# Altium PCB lagd_pcb.PcbDoc (part 6 of 7)
Units mm, origin at the board's own origin, x right, y up, seen from the top; angles counter-clockwise.
Board outline 172 x 145 mm, 6 copper layers (Top Layer, Layer 1, Layer 2, Layer 3, Layer 4, Bottom Layer), stack 0.816 mm thick; 588 components, 338 nets, 2165 pads, 565 vias.
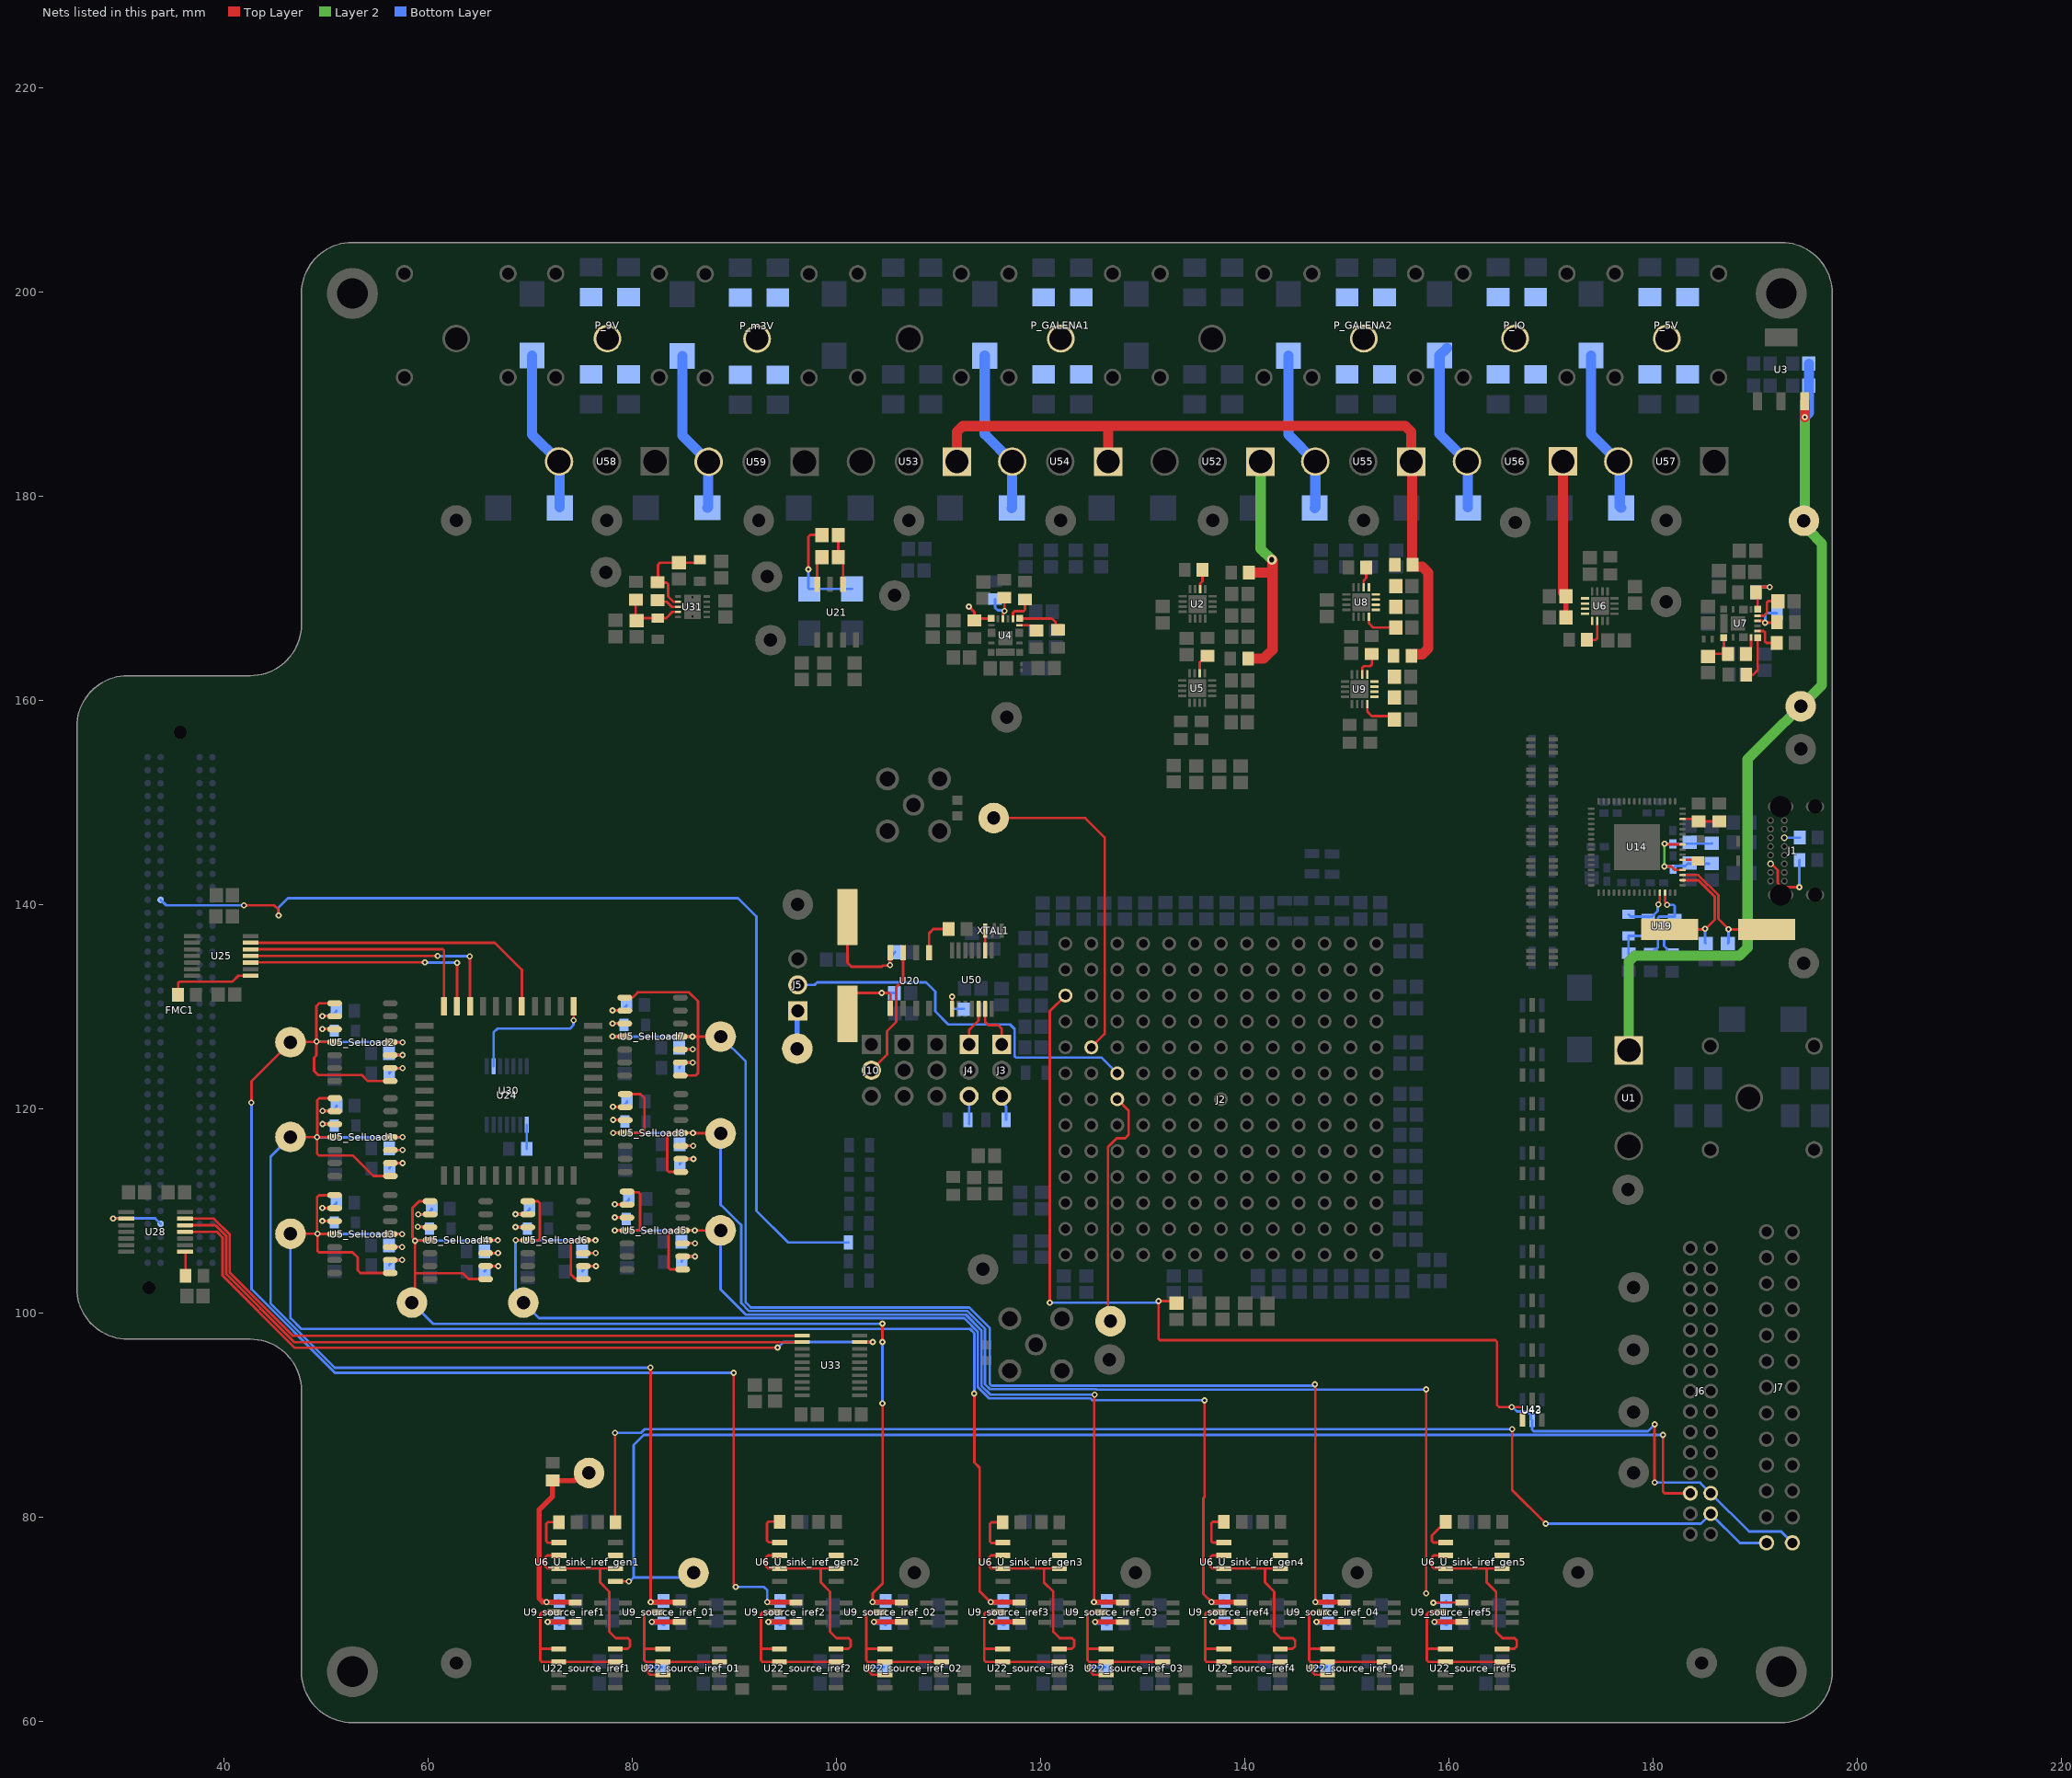
[diagram p9: the nets of this part, all layers, seen from the top]

## Via types
v1: diameter 0.6, hole 0.3, Top Layer to Bottom Layer, tented both sides, 505 vias
v2: diameter 0.3, hole 0.3, Top Layer to Bottom Layer, 20 vias
v3: diameter 0.55, hole 0.3, Top Layer to Bottom Layer, tented both sides, 18 vias
v4: diameter 0.55, hole 0.2, Top Layer to Bottom Layer, 16 vias
v5: diameter 0.6/0.6/0.6/0.6/0.6/0.6 (per signal layer), hole 0.3, Top Layer to Bottom Layer, tented both sides, 2 vias
v6: diameter 0.55/0.55/0.55/0.55/0.55/0.55 (per signal layer), hole 0.3, Top Layer to Bottom Layer, tented both sides, 2 vias
v7: diameter 1, hole 0.5, Top Layer to Bottom Layer, tented both sides, 2 vias

## Nets (pads, with @x,y where several pads share a name; then routed paths per layer and width w, separated by ;. In a path a pad name is that pad's centre, name@x,y a point inside that pad or via, vN(x,y) a via of type N, cw(c..) or ccw(c..) an arc to the next point about the centre after c; other vN are vias at no path point) (continued)
NetC49_2: C49.2 R26.2 U7.7 | length 3.8
  Top Layer w0.25: C49.2@185.396,164.311 185.646,164.561 R26.2@187.346,164.561 186.933,164.973 U7.7@186.933,166.123
NetC51_1: C51.1 U8.8 | length 3.4
  Top Layer w0.25: U8.8@152.151,168.175 152.153,168.173 152.153,167.554 152.574,167.133 C51.1@154.787,167.133
NetC52_2: C52.2 U7.15 | length 3.2
  Top Layer w0.25: U7.15@190.221,168.286 190.871,168.286 191.146,168.561 191.146,169.564 191.292,169.711 C52.2@192.221,169.711
NetC53_2: C53.2 C54.2 R30.1 U8.9 U8.10 U8.11 U8.12 U8.13
NetC55_1: C55.1 U9.8 | length 3.7
  Top Layer w0.25: U9.8@152.008,159.64 152.008,158.899 152.437,158.47 154.307,158.47 C55.1@154.66,158.116
NetC56_2: C56.2 C57.2 R76.1 U9.9 U9.10 U9.11 U9.12 U9.13 | length 0.1
  Top Layer w0.25: R76.1@154.577,164.343 R76.1@154.66,164.26
NetC62_2: C62.2 C63.2 C79.2 C80.2 FB2.2 FB3.2 U14.4 U14.9 | length 15.5
  Top Layer w0.25: v1(181.1,143.725) 181.8,143.725 182.14,143.385 U14.4@182.893,143.385 ; v1(181.125,145.95) 181.19,145.885 U14.9@182.893,145.885
  Layer 2 w0.25: v1(181.1,143.725) 181.113,143.738 181.113,145.937 v1(181.125,145.95)
  Bottom Layer w0.25: v1(181.1,143.725) 181.75,143.725 181.975,143.5 C80.2@181.975,143.45 181.975,143.55 182.2,143.775 183.15,143.775 183.425,144.05 183.47,144.005 FB3.2@185.482,144.005 ; v1(181.125,145.95) C63.2@181.95,145.95 185.714,145.95 FB2.2@185.764,146
NetC91_2: C91.2 U14.2 Y1.1 | length 12.4
  Top Layer w0.25: Y1.1@181.625,137.55 181.629,137.554 185.104,137.554 186.05,138.5 186.05,140.775 184.44,142.385 U14.2@182.893,142.385
  Bottom Layer w0.25: v1(185.1,137.625) 185.1,136.25 C91.2@185.15,136.2
NetC92_2: C92.2 U14.3 Y1.2 | length 13.2
  Top Layer w0.25: U14.3@182.893,142.885 184.435,142.885 186.4,140.92 186.4,138.6 187.45,137.55 Y1.2@191.125,137.55
  Bottom Layer w0.25: C92.2@187.325,136.2 187.4,136.275 v1(187.4,137.575)
NetC93_2: C93.2 U20.1 Y2.1 | length 8.5
  Top Layer w0.25: Y2.1@101.067,129.29 101.067,130.465 101.942,131.34 v1(104.417,131.34) 105.133,131.34 105.279,131.193 U20.1@105.279,129.809
  Bottom Layer w0.25: v1(104.417,131.34) 105.642,131.34 C93.2@105.667,131.315
NetC94_2: C94.2 U20.8 Y2.2 | length 11.6
  Top Layer w0.25: Y2.2@101.067,138.79 101.067,134.286 101.454,133.9 104.442,133.9 104.567,134.025 105.217,134.025 v1(105.242,134.05) ; v1@105.252,134.05 105.252,135.265 U20.8@105.262,135.275
  Bottom Layer w0.25: v1(105.242,134.05) 105.242,134.765 C94.2@105.732,135.34
NetC101_1: C101.1 C102.1 C103.1 C107.1 C108.1 C109.1 P_GALENA1.1 U54.3 | length 16.1
  Bottom Layer w1: C103.1@114.522,193.764 114.522,186.089 U54.3@117.222,183.39 117.197,183.365 117.197,178.864 C107.1@117.172,178.84
NetC104_1: C104.1 C105.1 C106.1 C110.1 C214.1 C215.1 P_GALENA2.1 U55.3 | length 16
  Bottom Layer w1: C106.1@144.267,193.764 144.267,186.034 U55.3@146.912,183.39 146.912,178.909 C110.1@146.842,178.84
NetC111_1: C111.1 U21.4 | length 2.9
  Top Layer w0.25: U21.4@98.102,171.362 98.102,173.559 C111.1@98.572,174.029
NetC111_2: C111.2 C112.1 U21.2 | length 5
  Top Layer w0.25: C112.1@100.172,176.198 C111.2@100.172,174.029 100.642,173.559 U21.2@100.642,171.362
NetC112_2: C112.2 D1.2 D2.1 | length 10.8
  Top Layer w0.25: v1(97.249,172.825) 97.249,176.029 97.421,176.2 C112.2@98.574,176.2
  Bottom Layer w0.25: v1(97.249,172.825) 97.249,170.984 D2.1@97.34,170.893 97.371,170.924 D1.2@101.531,170.924
NetC221_1: C221.1 C222.1 C223.1 C227.1 C228.1 C229.1 P_IO.1 U56.3 | length 17
  Bottom Layer w1: C223.1@159.8,194.5 C223.1@159.075,193.775 159.075,186.105 U56.3@161.78,183.4 ; C227.1@161.84,178.91 U56.3@161.84,183.34
NetC224_1: C224.1 C225.1 C226.1 C230.1 C231.1 C232.1 P_5V.1 U57.3 | length 16.1
  Bottom Layer w1: C230.1@173.925,193.775 173.925,186.075 U57.3@176.6,183.4 176.737,183.262 176.737,178.988 C226.1@176.875,178.85
NetC233_1: C233.1 C234.1 C235.1 C246.1 C247.1 C248.1 P_9V.1 U58.3 | length 16
  Bottom Layer w1: C235.1@70.174,193.775 70.174,186.035 U58.3@72.809,183.4 72.854,183.355 C246.1@72.854,178.895
NetC236_1: C236.1 C244.1 C245.1 C249.1 C250.1 C251.1 P_m3V.1 U59.3 | length 16
  Bottom Layer w1: C245.1@84.883,193.739 84.883,185.954 U59.3@87.473,183.364 87.415,183.307 87.415,178.921 C249.1@87.358,178.864
NetC238_1: C238.1 R47.1 R48.2 U31.9 | length 6.5
  Top Layer w0.25: R48.2@80.337,169.862 80.337,167.913 C238.1@80.437,167.813 80.687,168.063 R47.1@82.488,168.063 82.491,168.066 83.316,168.066 83.913,168.662 U31.9@84.488,168.662
NetC241_1: C241.1 R49.1 R50.2 U31.7 | length 9.5
  Top Layer w0.25: U31.7@84.488,169.663 84.012,169.663 83.512,170.162 83.512,171.366 83.366,171.512 82.512,171.512 82.512,173.287 82.713,173.488 C241.1@84.563,173.488 86.338,173.488 R49.1@86.613,173.762
"NetCLK _O_1": "CLK _O.1" J2.J2 | length 32.8
  Top Layer w0.25: 115.4,148.475 124.375,148.475 126.275,146.575 126.275,127.312 J2.J2@124.967,126.004
NetFMC1_G37: FMC1.G37 U28.2 | length 6.1
  Top Layer w0.15: v1(29.121,109.239) v1@29.125,109.235 ; U28.2@30.368,109.235 U28.2@30.372,109.231
  Top Layer w0.25: v1@29.125,109.235 U28.2@30.368,109.235
  Bottom Layer w0.25: v1(29.121,109.239) 29.139,109.257 33.242,109.257 FMC1.G37@33.782,108.717
NetHDL0_1: HDL0.1 R8_source_iref_03.2 U5_SelLoad5.1 U5_SelLoad5.4 U5_SelLoad5.8 U5_SelLoad5.11 U9_source_iref_03.2 | length 99.4
  Top Layer w0.25: v1(78.283,108.072) U5_SelLoad5.11@79.13,108.072 ; U5_SelLoad5.11@79.13,108.065 U5_SelLoad5.11@79.475,108.065 ; U5_SelLoad5.8@79.475,111.875 79.542,111.808 80.604,111.808 80.75,111.662 80.75,108.219 80.604,108.072 U5_SelLoad5.11@79.497,108.072 ; U5_SelLoad5.1@84.925,104.255 83.696,104.255 83.55,104.401 83.55,107.9 83.715,108.065 U5_SelLoad5.4@84.925,108.065 v1@86.11,108.065 ; v1(86.118,108.057) 86.126,108.066 88.641,108.066 HDL0.1@88.65,108.075 ; v1(125.22,71.667) 125.247,71.694 125.247,91.947 v1(125.275,91.975)
  Top Layer w0.5: v1(125.22,71.667) 125.239,71.648 127.997,71.648 U9_source_iref_03.2@128.025,71.62
  Bottom Layer w0.25: v1@78.29,108.065 v1@86.11,108.065 ; HDL0.1@88.65,108.075 88.65,102.3 91.125,99.825 112.67,99.825 114.2,98.295 114.2,92.857 115.073,91.983 125.267,91.983 v1(125.275,91.975)
  Bottom Layer w0.5: v1(125.22,71.667) 126.333,71.667 R8_source_iref_03.2@126.383,71.717
NetHDL1_1: HDL1.1 R8_source_iref_01.2 U5_SelLoad1.1 U5_SelLoad1.4 U5_SelLoad1.8 U5_SelLoad1.11 U9_source_iref_01.2 | length 113
  Top Layer w0.25: HDL1.1@46.5,117.222 46.511,117.211 49.089,117.211 v1(49.1,117.2) ; U5_SelLoad1.11@50.85,117.215 50.843,117.207 v1@49.132,117.207 ; U5_SelLoad1.8@50.85,121.025 49.325,121.025 49.132,120.832 v1@49.132,117.207 ; U5_SelLoad1.1@56.3,113.405 54.62,113.405 52.605,115.42 49.278,115.42 49.1,115.598 49.1,117.176 v1@49.132,117.207 ; U5_SelLoad1.4@56.3,117.215 v1@57.485,117.215 ; v1(81.775,94.65) 81.785,94.64 v1@81.785,71.679
  Top Layer w0.5: v1(81.775,94.65) 81.785,94.64 v1@81.785,94.615 ; v1@81.785,71.679 81.813,71.65 84.571,71.65 U9_source_iref_01.2@84.599,71.622
  Bottom Layer w0.25: HDL1.1@46.5,117.222 44.55,115.272 44.55,100.93 50.855,94.625 81.75,94.625 v1(81.775,94.65) ; v1(49.1,117.2) 49.104,117.204 57.489,117.204 v1(57.493,117.207)
  Bottom Layer w0.5: v1(81.794,71.669) 82.907,71.669 R8_source_iref_01.2@82.958,71.72
NetHUL0_1: HUL0.1 R8_source_iref4.2 U5_SelLoad6.1 U5_SelLoad6.4 U5_SelLoad6.8 U5_SelLoad6.11 U9_source_iref4.2 | length 126.3
  Top Layer w0.25: v1@68.565,107.115 U5_SelLoad6.11@69.75,107.115 70.779,107.115 70.925,107.261 70.925,110.75 70.75,110.925 U5_SelLoad6.8@69.75,110.925 ; U5_SelLoad6.1@75.2,103.305 75.138,103.367 74.383,103.367 73.975,103.775 73.975,106.9 74.19,107.115 U5_SelLoad6.4@75.2,107.115 v1@76.385,107.115 ; v1(136.05,91.425) 136.05,81.947 135.95,81.847 135.95,72.463 v1(136.744,71.669)
  Top Layer w0.5: v1(136.744,71.669) 136.763,71.65 139.521,71.65 U9_source_iref4.2@139.549,71.622
  Bottom Layer w0.25: v1(68.558,107.122) 68.558,101.937 HUL0.1@69.325,101.169 ; v1@68.565,107.115 v1@76.385,107.115 ; HUL0.1@69.325,101 70.85,99.475 112.525,99.475 113.85,98.15 113.85,92.712 114.928,91.633 124.85,91.633 125.033,91.45 136.025,91.45 v1(136.05,91.425)
  Bottom Layer w0.5: v1(136.744,71.669) 137.857,71.669 R8_source_iref4.2@137.908,71.72
  other v1: 76.393,107.107
NetHUL1_1: HUL1.1 R8_source_iref2.2 U5_SelLoad2.1 U5_SelLoad2.4 U5_SelLoad2.8 U5_SelLoad2.11 U9_source_iref2.2 | length 136.1
  Top Layer w0.25: v1(42.675,120.6) 42.675,122.687 HUL1.1@46.5,126.512 46.531,126.544 49.015,126.544 49.046,126.575 49.046,130.046 49.325,130.325 U5_SelLoad2.8@50.825,130.325 ; v1@49.046,126.571 49.05,126.568 49.05,125.203 48.825,124.978 48.825,123.7 49.225,123.3 53.5,123.3 54.095,122.705 U5_SelLoad2.1@56.275,122.705 ; v1(49.05,126.575) 49.08,126.545 50.81,126.545 U5_SelLoad2.11@50.85,126.505 ; U5_SelLoad2.4@56.3,126.505 v1@57.485,126.505 ; v1(89.925,94.125) 89.925,73.445 90.125,73.245 v1(90.125,73.15)
  Top Layer w0.5: v1(93.219,71.669) 93.238,71.65 95.996,71.65 U9_source_iref2.2@96.024,71.622
  Bottom Layer w0.25: v1(42.675,120.6) 42.675,102.31 50.86,94.125 v1(89.925,94.125) ; v1(49.05,126.575) 49.089,126.536 57.454,126.536 v1@57.485,126.505 ; v1(90.125,73.15) 92.875,73.15 93.219,72.806 v1(93.219,71.669)
  Bottom Layer w0.5: v1(93.219,71.669) 94.332,71.669 R8_source_iref2.2@94.383,71.72
  other v1: 57.493,126.497
NetJ1_3: J1.3 R69.1 | length 7.2
  Top Layer w0.25: J1.3@191.516,143.99 191.585,143.99 192.225,143.35 192.225,142.1 192.625,141.7 v1(194.325,141.7)
  Bottom Layer w0.25: v1(194.325,141.7) 194.325,144.325 R69.1@194.35,144.35
NetJ1_14: J1.14 R70.1 | length 1.5
  Bottom Layer w0.25: J1.14@192.866,146.54 194.365,146.54 R70.1@194.375,146.55
NetJ2_G3: J2.G3 PFB.1 | length 24
  Top Layer w0.25: PFB.1@127.1,98.925 126.597,99.428 126.597,116.247 127.45,117.1 128.275,117.1 128.625,117.45 128.625,119.807 J2.G3@127.507,120.924
NetJ2_H3: J2.H3 J5.2 | length 37.8
  Bottom Layer w0.25: J5.2@96.2,132.125 97.85,132.125 98.1,132.375 108.775,132.375 109.675,131.475 109.675,129.525 110.95,128.25 117,128.25 117.45,127.8 117.45,125.146 117.596,125 125.972,125 J2.H3@127.507,123.464
NetJ3_1: J3.1 U50.13 | length 4.7
  Top Layer w0.25: U50.13@114.567,129.718 114.567,128.489 114.867,128.189 115.842,128.189 116.192,127.84 J3.1@116.192,126.304
NetJ3_3: J3.3 R84.2 | length 2.5
  Bottom Layer w0.25: J3.3@116.192,121.224 116.503,120.914 116.503,120.337 116.625,120.216 R84.2@116.625,118.9
NetJ4_1: J4.1 U50.12 | length 3.8
  Top Layer w0.25: J4.1@112.986,126.304 112.986,127.708 113.342,128.064 113.917,128.639 U50.12@113.917,129.718
NetJ4_3: J4.3 R83.2 | length 2.7
  Bottom Layer w0.25: R83.2@112.986,118.498 J4.3@112.986,121.224
NetJ5_1: J5.1 PLLV.1 | length 3.7
  Bottom Layer w0.5: PLLV.1@96.15,125.875 96.15,129.535 J5.1@96.2,129.585
NetJDL0_1: JDL0.1 R8_source_iref_04.2 U5_SelLoad7.1 U5_SelLoad7.4 U5_SelLoad7.8 U5_SelLoad7.11 U9_source_iref_04.2 | length 144.5
  Top Layer w0.25: v1@78.065,127.065 U5_SelLoad7.11@79.25,127.065 ; U5_SelLoad7.8@79.25,130.875 79.315,130.94 80.065,130.94 80.525,131.4 85.554,131.4 86.425,130.529 86.425,127.059 ; U5_SelLoad7.1@84.7,123.255 86.205,123.255 86.425,123.475 86.425,127.059 ; U5_SelLoad7.4@84.7,127.065 v1@85.885,127.065 ; v1(85.893,127.057) 85.894,127.059 86.425,127.059 ; JDL0.1@88.65,127.061 88.648,127.059 86.425,127.059 ; v1(146.875,93) 146.919,92.956 v1(146.919,71.669)
  Top Layer w0.5: v1(146.919,71.669) 146.938,71.65 149.696,71.65 U9_source_iref_04.2@149.724,71.622
  Bottom Layer w0.25: v1@78.065,127.065 v1@85.885,127.065 ; JDL0.1@88.65,127.061 91.1,124.611 91.1,101.025 91.6,100.525 113,100.525 115.025,98.5 115.025,93.021 115.171,92.875 117.17,92.875 146.85,92.875 146.85,92.975 v1(146.875,93)
  Bottom Layer w0.5: v1(146.919,71.669) 148.032,71.669 R8_source_iref_04.2@148.083,71.72
  other v1: 78.058,127.072
NetJDL1_1: JDL1.1 R8_source_iref_02.2 U5_SelLoad4.1 U5_SelLoad4.4 U5_SelLoad4.8 U5_SelLoad4.11 U9_source_iref_02.2 | length 108
  Top Layer w0.25: JDL1.1@58.4,101 58.7,101.3 v1(58.7,107.05) ; 58.825,103.875 63.375,103.875 63.945,103.305 U5_SelLoad4.1@65.625,103.305 ; U5_SelLoad4.11@60.175,107.115 60.143,107.082 58.732,107.082 v1(58.7,107.05) ; U5_SelLoad4.8@60.175,110.925 59.11,110.925 58.457,110.272 58.457,107.371 58.7,107.128 v1(58.7,107.05) ; U5_SelLoad4.4@65.625,107.115 v1@66.81,107.115 ; v1(103.544,71.669) 103.544,72.519 104.525,73.5 v1@104.525,91.157 ; v1(104.5,97.15) v1(104.5,98.95)
  Top Layer w0.5: v1(103.544,71.669) 103.563,71.65 106.321,71.65 U9_source_iref_02.2@106.349,71.622
  Bottom Layer w0.25: JDL1.1@58.4,101 60.475,98.925 104.425,98.925 v1@104.45,98.95 ; v1(58.7,107.05) 58.729,107.079 66.774,107.079 v1@66.81,107.115 ; v1(104.5,91.125) v1(104.5,97.15)
  Bottom Layer w0.5: v1(103.544,71.669) 104.657,71.669 R8_source_iref_02.2@104.708,71.72
  other v1: 66.818,107.107
NetJUL0_1: JUL0.1 U5_SelLoad8.1 U5_SelLoad8.4 U5_SelLoad8.8 U5_SelLoad8.11 | length 137.7
  Top Layer w0.25: v1(78.125,117.615) U5_SelLoad8.11@79.3,117.615 81.029,117.615 81.175,117.761 81.175,121.05 80.8,121.425 U5_SelLoad8.8@79.3,121.425 ; U5_SelLoad8.1@84.75,113.805 83.571,113.805 83.425,113.951 83.425,117.45 83.59,117.615 U5_SelLoad8.4@84.75,117.615 v1@85.935,117.615 ; v1(85.943,117.607) 85.959,117.591 88.634,117.591 JUL0.1@88.65,117.575 ; v1@157.775,72.55 v1(157.775,92.5)
  Bottom Layer w0.25: v1(78.125,117.615) 78.129,117.611 85.931,117.611 v1@85.935,117.615 ; JUL0.1@88.65,117.575 88.65,110.584 88.723,110.511 ccw(c88.9,110.688) 88.724,110.51 90.59,108.691 cw(c90.415,108.513) 90.592,108.69 90.665,108.617 90.665,100.96 91.45,100.175 112.815,100.175 114.55,98.44 114.55,93.001 115.026,92.525 125.442,92.525 125.492,92.475 157.75,92.475 v1(157.775,92.5)
  other v1: 157.775,72.525
NetJUL1_1: JUL1.1 R8_source_iref3.2 U5_SelLoad3.1 U5_SelLoad3.4 U5_SelLoad3.8 U5_SelLoad3.11 U9_source_iref3.2 | length 136.5
  Top Layer w0.25: JUL1.1@46.5,107.75 v1(49.15,107.75) ; U5_SelLoad3.11@50.825,107.715 50.808,107.732 49.168,107.732 v1(49.15,107.75) ; U5_SelLoad3.8@50.825,111.525 49.3,111.525 49.107,111.332 49.107,107.793 v1(49.15,107.75) ; U5_SelLoad3.1@56.275,103.905 53.349,103.905 53.084,104.17 53.084,105.416 52.58,105.92 49.296,105.92 49.15,106.066 v1(49.15,107.75) ; U5_SelLoad3.4@56.275,107.715 v1(57.45,107.715) ; v1(113.5,92.1) 113.5,85.342 114.025,84.817 114.025,72.738 v1(115.094,71.669)
  Top Layer w0.5: v1(115.094,71.669) 115.113,71.65 117.871,71.65 U9_source_iref3.2@117.899,71.622
  Bottom Layer w0.25: JUL1.1@46.5,107.75 46.5,99.475 47.55,98.425 113.08,98.425 113.5,98.005 v1(113.5,92.1) ; v1(49.15,107.75) 49.168,107.732 57.432,107.732 v1(57.45,107.715)
  Bottom Layer w0.5: v1(115.094,71.669) 116.207,71.669 R8_source_iref3.2@116.258,71.72
NetPIRL_1: PIRL.1 R8_source_iref1.2 R45.2 U9_source_iref1.2 | length 20.9
  Top Layer w0.5: U9_source_iref1.2@74.399,71.622 74.371,71.65 71.613,71.65 v1(71.594,71.669) 71.575,71.688 71.199,71.688 70.875,72.012 70.875,80.725 72.175,82.025 R45.2@72.175,83.575 74.324,83.575 75.074,84.325 PIRL.1@75.75,84.325
  Bottom Layer w0.5: v1(71.594,71.669) 72.707,71.669 R8_source_iref1.2@72.758,71.72
NetR3_SelLoad1_2: R3_SelLoad1.2 U5_SelLoad1.10 | length 2.4
  Top Layer w0.25: v1(49.657,118.5) 49.664,118.492 50.843,118.492 U5_SelLoad1.10@50.85,118.485
  Bottom Layer w0.25: v1(49.657,118.5) 50.65,118.5 R3_SelLoad1.2@50.8,118.35
NetR3_SelLoad2_2: R3_SelLoad2.2 U5_SelLoad2.10 | length 2.4
  Top Layer w0.25: v1(49.625,127.8) 49.633,127.792 50.818,127.792 U5_SelLoad2.10@50.825,127.785
  Bottom Layer w0.25: v1(49.625,127.8) 50.625,127.8 R3_SelLoad2.2@50.775,127.65
NetR3_SelLoad3_2: R3_SelLoad3.2 U5_SelLoad3.10 | length 2.4
  Top Layer w0.25: v1(49.632,109) 49.639,108.992 50.818,108.992 U5_SelLoad3.10@50.825,108.985
  Bottom Layer w0.25: v1(49.632,109) 50.625,109 R3_SelLoad3.2@50.775,108.85
NetR3_SelLoad4_2: R3_SelLoad4.2 U5_SelLoad4.10 | length 2.4
  Top Layer w0.25: v1(58.982,108.425) 59.002,108.405 60.155,108.405 U5_SelLoad4.10@60.175,108.385
  Bottom Layer w0.25: v1(58.982,108.425) 59.95,108.425 R3_SelLoad4.2@60.125,108.25
NetR3_SelLoad5_2: R3_SelLoad5.2 U5_SelLoad5.10 | length 2.4
  Top Layer w0.25: v1@78.283,109.342 U5_SelLoad5.10@79.468,109.342
  Bottom Layer w0.25: v1(78.275,109.35) 79.275,109.35 R3_SelLoad5.2@79.425,109.2
NetR3_SelLoad6_2: R3_SelLoad6.2 U5_SelLoad6.10 | length 2.4
  Top Layer w0.25: v1(68.55,108.4) 68.558,108.392 69.743,108.392 U5_SelLoad6.10@69.75,108.385
  Bottom Layer w0.25: v1(68.55,108.4) 69.55,108.4 R3_SelLoad6.2@69.7,108.25
NetR3_SelLoad7_2: R3_SelLoad7.2 U5_SelLoad7.10 | length 2.4
  Top Layer w0.25: v1@78.058,128.342 U5_SelLoad7.10@79.243,128.342
  Bottom Layer w0.25: v1(78.05,128.35) 79.05,128.35 R3_SelLoad7.2@79.2,128.2
NetR3_SelLoad8_2: R3_SelLoad8.2 U5_SelLoad8.10 | length 2.3
  Top Layer w0.25: v1(78.125,118.9) 78.133,118.892 79.252,118.892 U5_SelLoad8.10@79.26,118.9
  Bottom Layer w0.25: v1(78.125,118.9) 79.1,118.9 R3_SelLoad8.2@79.25,118.75
NetR4_SelLoad1_2: R4_SelLoad1.2 U5_SelLoad1.9 | length 2.8
  Top Layer w0.25: v1(49.657,119.775) 49.667,119.765 50.84,119.765 U5_SelLoad1.9@50.85,119.755
  Bottom Layer w0.25: v1(49.657,119.775) 50.575,119.775 51.025,120.225 R4_SelLoad1.2@51.025,120.3
NetR4_SelLoad2_2: R4_SelLoad2.2 U5_SelLoad2.9 | length 2.8
  Top Layer w0.25: v1(49.625,129.075) 49.635,129.065 50.815,129.065 U5_SelLoad2.9@50.825,129.055
  Bottom Layer w0.25: v1(49.625,129.075) 50.55,129.075 51,129.525 R4_SelLoad2.2@51,129.6
NetR4_SelLoad3_2: R4_SelLoad3.2 U5_SelLoad3.9 | length 2.8
  Top Layer w0.25: v1(49.632,110.275) 49.642,110.265 50.815,110.265 U5_SelLoad3.9@50.825,110.255
  Bottom Layer w0.25: v1(49.632,110.275) 50.55,110.275 51,110.725 R4_SelLoad3.2@51,110.8
NetR4_SelLoad4_2: R4_SelLoad4.2 U5_SelLoad4.9 | length 2.8
  Top Layer w0.25: v1(59.025,109.65) 59.027,109.652 60.173,109.652 U5_SelLoad4.9@60.175,109.655
  Bottom Layer w0.25: v1(59.025,109.65) 59.9,109.65 60.35,110.1 R4_SelLoad4.2@60.35,110.2
NetR4_SelLoad5_2: R4_SelLoad5.2 U5_SelLoad5.9 | length 2.8
  Top Layer w0.25: v1@78.285,110.615 U5_SelLoad5.9@79.465,110.615
  Bottom Layer w0.25: v1(78.275,110.625) 79.2,110.625 79.65,111.075 R4_SelLoad5.2@79.65,111.15
NetR4_SelLoad6_2: R4_SelLoad6.2 U5_SelLoad6.9 | length 2.8
  Top Layer w0.25: v1(68.55,109.675) 68.56,109.665 69.74,109.665 U5_SelLoad6.9@69.75,109.655
  Bottom Layer w0.25: v1(68.55,109.675) 69.475,109.675 69.925,110.125 R4_SelLoad6.2@69.925,110.2
NetR4_SelLoad7_2: R4_SelLoad7.2 U5_SelLoad7.9 | length 2.8
  Top Layer w0.25: v1@78.06,129.615 U5_SelLoad7.9@79.24,129.615
  Bottom Layer w0.25: v1(78.05,129.625) 78.975,129.625 79.425,130.075 R4_SelLoad7.2@79.425,130.15
NetR4_SelLoad8_2: R4_SelLoad8.2 U5_SelLoad8.9 | length 2.8
  Top Layer w0.25: v1@78.11,120.165 U5_SelLoad8.9@79.29,120.165
  Bottom Layer w0.25: v1(78.1,120.175) 79.025,120.175 79.475,120.625 R4_SelLoad8.2@79.475,120.7
NetR5_SelLoad1_2: R5_SelLoad1.2 U5_SelLoad1.3 | length 2.6
  Top Layer w0.25: U5_SelLoad1.3@56.3,115.945 56.308,115.952 57.493,115.952 v1(57.5,115.96)
  Bottom Layer w0.25: R5_SelLoad1.2@56.175,116.125 56.34,115.96 v1(57.5,115.96)
NetR5_SelLoad2_2: R5_SelLoad2.2 U5_SelLoad2.3 | length 2.6
  Top Layer w0.25: U5_SelLoad2.3@56.275,125.245 56.29,125.26 v1(57.485,125.26)
  Bottom Layer w0.25: R5_SelLoad2.2@56.15,125.425 56.315,125.26 v1(57.485,125.26)
NetR5_SelLoad3_2: R5_SelLoad3.2 U5_SelLoad3.3 | length 2.5
  Top Layer w0.25: U5_SelLoad3.3@56.275,106.445 56.283,106.452 57.442,106.452 v1(57.45,106.46)
  Bottom Layer w0.25: R5_SelLoad3.2@56.15,106.625 56.315,106.46 v1(57.45,106.46)
NetR5_SelLoad4_2: R5_SelLoad4.2 U5_SelLoad4.3 | length 2.6
  Top Layer w0.25: U5_SelLoad4.3@65.625,105.845 65.64,105.86 v1(66.835,105.86)
  Bottom Layer w0.25: R5_SelLoad4.2@65.5,106.025 65.665,105.86 v1(66.835,105.86)
NetR5_SelLoad5_2: R5_SelLoad5.2 U5_SelLoad5.3 | length 2.6
  Top Layer w0.25: U5_SelLoad5.3@84.94,106.81 v1(86.135,106.81)
  Bottom Layer w0.25: R5_SelLoad5.2@84.8,106.975 84.965,106.81 v1(86.135,106.81)
NetR5_SelLoad6_2: R5_SelLoad6.2 U5_SelLoad6.3 | length 2.6
  Top Layer w0.25: U5_SelLoad6.3@75.215,105.86 v1(76.41,105.86)
  Bottom Layer w0.25: R5_SelLoad6.2@75.075,106.025 75.24,105.86 v1(76.41,105.86)
NetR5_SelLoad7_2: R5_SelLoad7.2 U5_SelLoad7.3 | length 2.6
  Top Layer w0.25: U5_SelLoad7.3@84.715,125.81 84.723,125.802 85.893,125.802 v1(85.9,125.81)
  Bottom Layer w0.25: R5_SelLoad7.2@84.575,125.975 84.74,125.81 v1(85.9,125.81)
NetR5_SelLoad8_2: R5_SelLoad8.2 U5_SelLoad8.3 | length 2.6
  Top Layer w0.25: U5_SelLoad8.3@84.765,116.36 v1(85.96,116.36)
  Bottom Layer w0.25: R5_SelLoad8.2@84.625,116.525 84.79,116.36 v1(85.96,116.36)
NetR6_SelLoad1_2: R6_SelLoad1.2 U5_SelLoad1.2 | length 2.8
  Top Layer w0.25: U5_SelLoad1.2@56.3,114.675 v1(57.5,114.675)
  Bottom Layer w0.25: R6_SelLoad1.2@56.2,114.15 56.2,114.225 56.65,114.675 v1(57.5,114.675)
NetR6_SelLoad2_2: R6_SelLoad2.2 U5_SelLoad2.2 | length 2.8
  Top Layer w0.25: U5_SelLoad2.2@56.275,123.975 v1(57.5,123.975)
  Bottom Layer w0.25: R6_SelLoad2.2@56.175,123.45 56.175,123.525 56.625,123.975 v1(57.5,123.975)
NetR6_SelLoad3_2: R6_SelLoad3.2 U5_SelLoad3.2 | length 2.7
  Top Layer w0.25: U5_SelLoad3.2@56.275,105.175 v1(57.45,105.175)
  Bottom Layer w0.25: R6_SelLoad3.2@56.175,104.65 56.175,104.725 56.625,105.175 v1(57.45,105.175)
NetR6_SelLoad4_2: R6_SelLoad4.2 U5_SelLoad4.2 | length 2.8
  Top Layer w0.25: U5_SelLoad4.2@65.625,104.575 v1(66.85,104.575)
  Bottom Layer w0.25: R6_SelLoad4.2@65.525,104.05 65.525,104.125 65.975,104.575 v1(66.85,104.575)
NetR6_SelLoad5_2: R6_SelLoad5.2 U5_SelLoad5.2 | length 2.8
  Top Layer w0.25: U5_SelLoad5.2@84.925,105.525 v1(86.15,105.525)
  Bottom Layer w0.25: R6_SelLoad5.2@84.825,105 84.825,105.075 85.275,105.525 v1(86.15,105.525)
NetR6_SelLoad6_2: R6_SelLoad6.2 U5_SelLoad6.2 | length 2.8
  Top Layer w0.25: U5_SelLoad6.2@75.2,104.575 v1(76.425,104.575)
  Bottom Layer w0.25: R6_SelLoad6.2@75.1,104.05 75.1,104.125 75.55,104.575 v1(76.425,104.575)
NetR6_SelLoad7_2: R6_SelLoad7.2 U5_SelLoad7.2 | length 2.8
  Top Layer w0.25: U5_SelLoad7.2@84.7,124.525 v1(85.9,124.525)
  Bottom Layer w0.25: R6_SelLoad7.2@84.6,124 84.6,124.075 85.05,124.525 v1(85.9,124.525)
NetR6_SelLoad8_2: R6_SelLoad8.2 U5_SelLoad8.2 | length 2.8
  Top Layer w0.25: U5_SelLoad8.2@84.75,115.075 v1(85.975,115.075)
  Bottom Layer w0.25: R6_SelLoad8.2@84.65,114.55 84.65,114.625 85.1,115.075 v1(85.975,115.075)
NetR7_source_iref1_1: R7_source_iref1.1 U9_source_iref1.1 | length 3.9
  Top Layer w0.5: v1(71.7,69.725) 71.704,69.721 74.395,69.721 U9_source_iref1.1@74.399,69.717
  Bottom Layer w0.5: v1(71.7,69.725) 71.719,69.706 72.696,69.706 R7_source_iref1.1@72.858,69.545
NetR7_source_iref2_1: R7_source_iref2.1 U9_source_iref2.1 | length 3.9
  Top Layer w0.5: v1(93.325,69.725) 93.329,69.721 96.02,69.721 U9_source_iref2.1@96.024,69.717
  Bottom Layer w0.5: v1(93.325,69.725) 93.344,69.706 94.321,69.706 R7_source_iref2.1@94.483,69.545
NetR7_source_iref3_1: R7_source_iref3.1 U9_source_iref3.1 | length 3.9
  Top Layer w0.5: v1(115.2,69.725) 115.204,69.721 117.895,69.721 U9_source_iref3.1@117.899,69.717
  Bottom Layer w0.5: v1(115.2,69.725) 115.219,69.706 116.196,69.706 R7_source_iref3.1@116.358,69.545
NetR7_source_iref4_1: R7_source_iref4.1 U9_source_iref4.1 | length 3.9
  Top Layer w0.5: v1(136.85,69.725) 136.854,69.721 139.545,69.721 U9_source_iref4.1@139.549,69.717
  Bottom Layer w0.5: v1(136.85,69.725) 136.869,69.706 137.846,69.706 R7_source_iref4.1@138.008,69.545
NetR7_source_iref5_1: R7_source_iref5.1 U9_source_iref5.1 | length 3.9
  Top Layer w0.5: v1(158.575,69.725) 158.579,69.721 161.27,69.721 U9_source_iref5.1@161.274,69.717
  Bottom Layer w0.5: v1(158.575,69.725) 158.594,69.706 159.571,69.706 R7_source_iref5.1@159.733,69.545
NetR7_source_iref_01_1: R7_source_iref_01.1 U9_source_iref_01.1 | length 3.9
  Top Layer w0.5: v1(81.9,69.725) 81.904,69.721 84.595,69.721 U9_source_iref_01.1@84.599,69.717
  Bottom Layer w0.5: v1(81.9,69.725) 81.919,69.706 82.896,69.706 R7_source_iref_01.1@83.058,69.545
NetR7_source_iref_02_1: R7_source_iref_02.1 U9_source_iref_02.1 | length 3.9
  Top Layer w0.5: v1(103.65,69.725) 103.654,69.721 106.345,69.721 U9_source_iref_02.1@106.349,69.717
  Bottom Layer w0.5: v1(103.65,69.725) 103.669,69.706 104.646,69.706 R7_source_iref_02.1@104.808,69.545
NetR7_source_iref_03_1: R7_source_iref_03.1 U9_source_iref_03.1 | length 3.9
  Top Layer w0.5: v1(125.326,69.723) 125.33,69.719 128.021,69.719 U9_source_iref_03.1@128.025,69.715
  Bottom Layer w0.5: v1(125.326,69.723) 125.345,69.704 126.322,69.704 R7_source_iref_03.1@126.483,69.542
NetR7_source_iref_04_1: R7_source_iref_04.1 U9_source_iref_04.1 | length 3.9
  Top Layer w0.5: v1(147.025,69.725) 147.029,69.721 149.72,69.721 U9_source_iref_04.1@149.724,69.717
  Bottom Layer w0.5: v1(147.025,69.725) 147.044,69.706 148.021,69.706 R7_source_iref_04.1@148.183,69.545
NetR8_source_iref5_2: R8_source_iref5.2 U9_source_iref5.2 | length 4.1
  Top Layer w0.25: v1(158.475,71.6) 158.497,71.622 U9_source_iref5.2@161.274,71.622
  Bottom Layer w0.25: v1(158.475,71.6) 159.563,71.6 R8_source_iref5.2@159.733,71.77
NetR9_2: R9.2 U2.14 | length 2
  Top Layer w0.25: U2.14@135.633,170.887 135.633,171.443 135.865,171.676 R9.2@135.865,172.796
NetR11_1: R11.1 R19.2 U4.1 | length 4.6
  Top Layer w0.25: v1(112.962,169.185) 112.962,169.213 113.512,168.663 R11.1@113.512,167.835 ; R11.1@113.699,168.023 U4.1@115.124,168.023
  Bottom Layer w0.25: v1(112.962,169.185) 113.497,168.649 R19.2@113.497,167.839
NetR12_1: R12.1 R20.2 U4.14 | length 4.1
  Top Layer w0.25: U4.14@116.297,167.99 116.297,168.492 116.462,168.656 v1(116.462,168.751) 116.462,170.025 R12.1@116.422,170.065
  Bottom Layer w0.25: R20.2@115.547,169.915 115.547,169.065 115.794,168.818 116.395,168.818 v1(116.462,168.751)
NetR13_2: R13.2 U5.14 | length 2.1
  Top Layer w0.25: U5.14@135.59,162.644 135.592,162.646 135.592,163.723 136.24,164.371 R13.2@136.34,164.371
NetR16_2: R16.2 U4.10 | length 1.9
  Top Layer w0.25: U4.10@117.922,167.365 118.447,167.365 118.96,167.365 119.475,166.85 R16.2@119.575,166.85
NetR21_2: R21.2 U4.12 | length 2.9
  Top Layer w0.25: U4.12@117.287,167.99 117.287,168.585 117.437,168.735 118.315,168.735 118.462,168.881 R21.2@118.462,169.885
NetR22_2: R22.2 U4.11 | length 4.4
  Top Layer w0.25: U4.11@117.949,168.023 121.124,168.023 121.453,167.693 R22.2@121.453,166.983
NetR23_2: R23.2 U6.14 | length 2.8
  Top Layer w0.25: R23.2@173.525,165.925 174.389,165.925 174.536,166.071 U6.14@174.536,167.783
NetR24_1: R24.1 R28.2 U7.1 | length 5
  Top Layer w0.25: U7.1@190.258,168.948 190.258,170.373 R24.1@190.071,170.561 190.071,170.661 190.521,171.111 v1(191.421,171.111)
  Bottom Layer w0.25: R28.2@190.071,170.561 190.071,170.661 190.521,171.111 v1(191.421,171.111)
NetR25_1: R25.1 R29.2 U7.14 | length 4
  Top Layer w0.25: U7.14@190.221,167.786 190.717,167.786 190.892,167.611 192.12,167.611 R25.1@192.146,167.636
  Bottom Layer w0.25: v1(190.986,167.611) 190.986,168.414 191.133,168.56 192.121,168.56 R29.2@192.146,168.536
NetR26_1: R26.1 U7.10 | length 1.8
  Top Layer w0.25: R26.1@189.095,164.561 189.095,164.661 189.596,165.161 U7.10@189.596,166.161
NetR27_2: R27.2 U8.14 | length 2.1
  Top Layer w0.25: U8.14@151.65,171.07 151.65,171.723 151.902,171.975 R27.2@151.902,173.018
NetR31_1: R31.1 R32.2 U14.14 | length 3.7
  Top Layer w0.25: U14.14@182.893,148.385 184.24,148.385 R31.1@184.475,148.15 R32.2@186.5,148.15
NetR33_2: R33.2 U14.6 | length 1.6
  Top Layer w0.25: U14.6@182.893,144.385 184.265,144.385 R33.2@184.4,144.25
NetR34_2: R34.2 U14.62 U19.4 | length 8.6
  Top Layer w0.25: U14.62@181.168,141.16 181.168,140.277 181.375,140.07 v1(181.375,139.975)
  Bottom Layer w0.25: R34.2@179.775,135.2 180.225,135.65 180.329,135.65 180.475,135.796 180.475,138.679 180.621,138.825 181.744,138.825 181.963,138.825 U19.4@182.125,138.825 182.125,139.829 181.979,139.975 v1(181.375,139.975)
NetR35_2: R35.2 U19.5 | length 4.1
  Bottom Layer w0.25: R35.2@181.875,135.15 181.775,135.15 181.325,135.6 181.325,135.7 181.075,135.95 181.075,137.729 181.221,137.875 U19.5@182.125,137.875
NetR36_2: R36.2 R37.1 U19.1 | length 3.8
  Bottom Layer w0.25: R36.2@177.6,135.125 R37.1@177.6,136.925 U19.1@179.534,136.925 ; R36.2@177.7,135.05 R36.2@177.725,135.075
NetR37_2: R37.2 U14.61 U19.3 | length 5
  Top Layer w0.25: v1(180.525,140) 180.525,140.095 180.668,140.238 U14.61@180.668,141.16
  Bottom Layer w0.25: R37.2@177.6,139.025 177.8,138.825 179.915,138.825 180.458,139.368 180.458,139.933 v1(180.525,140)
NetR38_1: R38.1 U20.5 | length 4
  Top Layer w0.25: U20.5@109.072,135.275 109.072,137.17 109.492,137.59 ; 109.442,137.589 R38.1@110.992,137.589
NetR41_1: R41.1 U25.8 | length 8.3
  Top Layer w0.25: R41.1@35.5,131.45 35.5,132.304 35.646,132.45 40.825,132.45 41.4,133.025 U25.8@42.65,133.025
NetR44_1: R44.1 U28.8 | length 2.3
  Top Layer w0.25: U28.8@36.214,105.981 36.225,105.97 R44.1@36.225,103.65
NetR46_2: R46.2 U50.8 | length 3.5
  Top Layer w0.25: U50.8@111.317,129.769 111.321,129.773 111.321,130.971 v1(111.325,130.975)
  Bottom Layer w0.25: v1(111.325,130.975) 111.325,129.936 111.481,129.78 R46.2@112.467,129.78
NetR50_1: R50.1 U31.8 | length 2.3
  Top Layer w0.25: R50.1@82.462,169.813 82.616,169.659 83.366,169.659 83.863,169.162 U31.8@84.488,169.162
NetR52_2: R52.2 U6_U_sink_iref_gen2.1 | length 4.3
  Top Layer w0.25: R52.2@94.399,79.549 93.349,79.549 93.199,79.399 93.199,77.676 93.346,77.529 U6_U_sink_iref_gen2.1@94.431,77.529
NetR54_1: R54.1 U22_source_iref_01.3 | length 3.6
  Top Layer w0.25: v1@81.423,65.245 81.423,64.886 81.761,64.548 U22_source_iref_01.3@82.987,64.548
  Bottom Layer w0.25: v1(81.375,65.293) R54.1@82.893,65.293
NetR58_2: R58.2 U6_U_sink_iref_gen5.1 | length 3.9
  Top Layer w0.25: R58.2@159.675,79.525 159.675,79.425 159.225,78.975 159.125,78.975 158.345,78.195 158.345,77.651 158.491,77.505 U6_U_sink_iref_gen5.1@159.681,77.505
NetR59_2: R59.2 U6_U_sink_iref_gen4.1 | length 4.3
  Top Layer w0.25: R59.2@137.925,79.525 136.875,79.525 136.725,79.375 136.725,77.651 136.871,77.505 U6_U_sink_iref_gen4.1@137.956,77.505
NetR60_2: R60.2 U6_U_sink_iref_gen3.1 | length 4.3
  Top Layer w0.25: R60.2@116.249,79.474 115.199,79.474 115.049,79.324 115.049,77.601 115.196,77.454 U6_U_sink_iref_gen3.1@116.281,77.454
NetR63_1: R63.1 U22_source_iref_04.3 | length 3.7
  Top Layer w0.25: v1(146.5,65.293) 146.548,65.245 146.548,64.886 146.886,64.548 U22_source_iref_04.3@148.112,64.548
  Bottom Layer w0.25: v1(146.5,65.293) 148.018,65.293 R63.1@148.05,65.325
NetR64_1: R64.1 U22_source_iref_03.3 | length 3.6
  Top Layer w0.25: v1@124.849,65.242 124.849,64.884 125.187,64.545 U22_source_iref_03.3@126.412,64.545
  Bottom Layer w0.25: v1(124.801,65.29) R64.1@126.318,65.29
NetR66_1: R66.1 U22_source_iref_02.3 | length 3.6
  Top Layer w0.25: v1@103.173,65.245 103.173,64.886 103.511,64.548 U22_source_iref_02.3@104.737,64.548
  Bottom Layer w0.25: v1(103.125,65.293) R66.1@104.643,65.293
NetR68_2: R68.2 U6_U_sink_iref_gen1.1 | length 4.3
  Top Layer w0.25: R68.2@72.774,79.499 71.724,79.499 71.574,79.349 71.574,77.626 71.721,77.479 U6_U_sink_iref_gen1.1@72.806,77.479
NetR71_2: R71.2 U7.12 | length 2.9
  Top Layer w0.25: U7.12@190.221,166.786 190.821,166.786 190.971,166.636 190.971,165.757 191.117,165.611 R71.2@192.121,165.611
NetR72_2: R72.2 U7.11 | length 4.5
  Top Layer w0.25: R72.2@189.121,162.511 189.821,162.511 190.258,162.948 U7.11@190.258,166.123
NetR73_2: R73.2 U9.14 | length 2.8
  Top Layer w0.25: U9.14@151.508,162.536 151.508,163.197 151.654,163.343 152.277,163.343 152.452,163.518 R73.2@152.452,164.543
NetR77_1: R77.1 U24.8 | length 2.4
  Bottom Layer w0.25: R77.1@69.65,116.075 U24.8@69.65,118.43
NetU6_U_sink_iref_gen1_2: U6_U_sink_iref_gen1.2 U6_U_sink_iref_gen1.3 U6_U_sink_iref_gen1.6 U22_source_iref1.8 | length 20.5
  Top Layer w0.25: U6_U_sink_iref_gen1.2@72.881,76.235 71.66,76.235 71.475,76.05 71.475,75.15 71.65,74.975 72.871,74.975 72.881,74.965 76.825,74.965 ; U22_source_iref1.8@78.324,67.088 79.538,67.088 79.775,67.325 79.775,67.925 79.575,68.125 78.371,68.125 77.743,68.754 77.743,72.682 76.825,73.6 76.825,74.965 ; U6_U_sink_iref_gen1.6@78.429,74.975 78.419,74.965 76.825,74.965
NetU6_U_sink_iref_gen1_7: U6_U_sink_iref_gen1.7
NetU6_U_sink_iref_gen2_2: U6_U_sink_iref_gen2.2 U6_U_sink_iref_gen2.3 U6_U_sink_iref_gen2.6 U22_source_iref2.8 | length 20.5
  Top Layer w0.25: U6_U_sink_iref_gen2.2@94.506,76.235 93.285,76.235 93.1,76.05 93.1,75.15 93.275,74.975 94.496,74.975 94.506,74.965 98.45,74.965 ; U22_source_iref2.8@99.949,67.088 101.163,67.088 101.4,67.325 101.4,67.925 101.2,68.125 99.996,68.125 99.368,68.754 99.368,72.682 98.45,73.6 98.45,74.965 ; U6_U_sink_iref_gen2.6@100.054,74.975 100.044,74.965 98.45,74.965
NetU6_U_sink_iref_gen2_7: U6_U_sink_iref_gen2.7
NetU6_U_sink_iref_gen3_2: U6_U_sink_iref_gen3.2 U6_U_sink_iref_gen3.3 U6_U_sink_iref_gen3.6 U22_source_iref3.8 | length 20.5
  Top Layer w0.25: U6_U_sink_iref_gen3.2@116.381,76.235 115.16,76.235 114.975,76.05 114.975,75.15 115.15,74.975 116.371,74.975 116.381,74.965 120.325,74.965 ; U22_source_iref3.8@121.824,67.088 123.038,67.088 123.275,67.325 123.275,67.925 123.075,68.125 121.871,68.125 121.243,68.754 121.243,72.682 120.325,73.6 120.325,74.965 ; U6_U_sink_iref_gen3.6@121.929,74.975 121.919,74.965 120.325,74.965
NetU6_U_sink_iref_gen3_7: U6_U_sink_iref_gen3.7
NetU6_U_sink_iref_gen4_2: U6_U_sink_iref_gen4.2 U6_U_sink_iref_gen4.3 U6_U_sink_iref_gen4.6 U22_source_iref4.8 | length 20.5
  Top Layer w0.25: U6_U_sink_iref_gen4.2@138.031,76.235 136.81,76.235 136.625,76.05 136.625,75.15 136.8,74.975 138.021,74.975 138.031,74.965 141.975,74.965 ; U22_source_iref4.8@143.474,67.088 144.688,67.088 144.925,67.325 144.925,67.925 144.725,68.125 143.521,68.125 142.893,68.754 142.893,72.682 141.975,73.6 141.975,74.965 ; U6_U_sink_iref_gen4.6@143.579,74.975 143.569,74.965 141.975,74.965
NetU6_U_sink_iref_gen4_7: U6_U_sink_iref_gen4.7
NetU6_U_sink_iref_gen5_2: U6_U_sink_iref_gen5.2 U6_U_sink_iref_gen5.3 U6_U_sink_iref_gen5.6 U22_source_iref5.8 | length 20.5
  Top Layer w0.25: U6_U_sink_iref_gen5.2@159.756,76.235 158.535,76.235 158.35,76.05 158.35,75.15 158.525,74.975 159.746,74.975 159.756,74.965 163.7,74.965 ; U22_source_iref5.8@165.199,67.088 166.413,67.088 166.65,67.325 166.65,67.925 166.45,68.125 165.246,68.125 164.618,68.754 164.618,72.682 163.7,73.6 163.7,74.965 ; U6_U_sink_iref_gen5.6@165.304,74.975 165.294,74.965 163.7,74.965
NetU6_U_sink_iref_gen5_7: U6_U_sink_iref_gen5.7
NetU9_source_iref1_3: U9_source_iref1.3 U22_source_iref1.1 U22_source_iref1.2 U22_source_iref1.7 | length 14.6
  Top Layer w0.25: U22_source_iref1.2@72.22,65.818 71.116,65.818 70.97,65.964 70.97,67.088 ; U9_source_iref1.3@72.316,70.67 71.116,70.67 70.97,70.523 70.97,67.088 ; U22_source_iref1.2@72.787,65.818 U22_source_iref1.7@78.324,65.818 ; U22_source_iref1.1@72.787,67.088 70.97,67.088
NetU9_source_iref2_3: U9_source_iref2.3 U22_source_iref2.1 U22_source_iref2.2 U22_source_iref2.7 | length 14.6
  Top Layer w0.25: U22_source_iref2.2@93.845,65.818 92.741,65.818 92.595,65.964 92.595,67.088 ; U9_source_iref2.3@93.941,70.67 92.741,70.67 92.595,70.523 92.595,67.088 ; U22_source_iref2.2@94.412,65.818 U22_source_iref2.7@99.949,65.818 ; U22_source_iref2.1@94.412,67.088 92.595,67.088
NetU9_source_iref3_3: U9_source_iref3.3 U22_source_iref3.1 U22_source_iref3.2 U22_source_iref3.7 | length 14.6
  Top Layer w0.25: U22_source_iref3.2@115.72,65.818 114.616,65.818 114.47,65.964 114.47,67.088 ; U9_source_iref3.3@115.816,70.67 114.616,70.67 114.47,70.523 114.47,67.088 ; U22_source_iref3.2@116.287,65.818 U22_source_iref3.7@121.824,65.818 ; U22_source_iref3.1@116.287,67.088 114.47,67.088
NetU9_source_iref4_3: U9_source_iref4.3 U22_source_iref4.1 U22_source_iref4.2 U22_source_iref4.7 | length 14.6
  Top Layer w0.25: U22_source_iref4.2@137.37,65.818 136.266,65.818 136.12,65.964 136.12,67.088 ; U9_source_iref4.3@137.466,70.67 136.266,70.67 136.12,70.523 136.12,67.088 ; U22_source_iref4.2@137.937,65.818 U22_source_iref4.7@143.474,65.818 ; U22_source_iref4.1@137.937,67.088 136.12,67.088
NetU9_source_iref5_3: U9_source_iref5.3 U22_source_iref5.1 U22_source_iref5.2 U22_source_iref5.7 | length 14.6
  Top Layer w0.25: U22_source_iref5.2@159.095,65.818 157.991,65.818 157.845,65.964 157.845,67.088 ; U9_source_iref5.3@159.191,70.67 157.991,70.67 157.845,70.523 157.845,67.088 ; U22_source_iref5.2@159.662,65.818 U22_source_iref5.7@165.199,65.818 ; U22_source_iref5.1@159.662,67.088 157.845,67.088
NetU9_source_iref_01_3: U9_source_iref_01.3 U22_source_iref_01.1 U22_source_iref_01.2 U22_source_iref_01.7 | length 14.6
  Top Layer w0.25: U22_source_iref_01.2@82.42,65.818 81.316,65.818 81.17,65.964 81.17,67.088 ; U9_source_iref_01.3@82.516,70.67 81.316,70.67 81.17,70.523 81.17,67.088 ; U22_source_iref_01.2@82.987,65.818 U22_source_iref_01.7@88.524,65.818 ; U22_source_iref_01.1@82.987,67.088 81.17,67.088
NetU9_source_iref_02_3: U9_source_iref_02.3 U22_source_iref_02.1 U22_source_iref_02.2 U22_source_iref_02.7 | length 14.6
  Top Layer w0.25: U22_source_iref_02.2@104.17,65.818 103.066,65.818 102.92,65.964 102.92,67.088 ; U9_source_iref_02.3@104.266,70.67 103.066,70.67 102.92,70.523 102.92,67.088 ; U22_source_iref_02.2@104.737,65.818 U22_source_iref_02.7@110.274,65.818 ; U22_source_iref_02.1@104.737,67.088 102.92,67.088
NetU9_source_iref_03_3: U9_source_iref_03.3 U22_source_iref_03.1 U22_source_iref_03.2 U22_source_iref_03.7 | length 14.6
  Top Layer w0.25: U22_source_iref_03.2@125.846,65.815 124.742,65.815 124.595,65.962 124.595,67.085 ; U9_source_iref_03.3@125.942,70.667 124.742,70.667 124.595,70.521 124.595,67.085 ; U22_source_iref_03.2@126.412,65.815 U22_source_iref_03.7@131.95,65.815 ; U22_source_iref_03.1@126.412,67.085 124.595,67.085
NetU9_source_iref_04_3: U9_source_iref_04.3 U22_source_iref_04.1 U22_source_iref_04.2 U22_source_iref_04.7 | length 15.2
  Top Layer w0.25: U9_source_iref_04.3@147.641,70.67 146.441,70.67 146.295,70.523 146.295,67.088 ; U22_source_iref_04.1@148.112,67.088 146.295,67.088 ; U22_source_iref_04.7@153.649,65.818 146.441,65.818 146.295,65.964 146.295,67.088
NetU24_2: U24.2 U30.18 | length 13.3
  Top Layer w0.25: v1(74.233,128.658) 74.242,128.667 74.242,130.022 U30.18@74.25,130.03
  Bottom Layer w0.25: U24.2@66.4,124.17 66.4,127.475 66.763,127.838 73.881,127.838 74.233,128.189 v1(74.233,128.658)
NetU25_10: U25.10 U30.27 | length 24.5
  Top Layer w0.25: U25.10@42.598,134.311 42.617,134.33 v1@59.67,134.33 ; U30.27@62.82,130.03 62.823,130.033 62.823,134.298 v1(62.825,134.3)
  Bottom Layer w0.25: v1@59.687,134.312 v1@62.813,134.312
  other v1: 59.675,134.325
NetU25_11: U25.11 U30.26 | length 26.2
  Top Layer w0.25: U25.11@42.78,134.95 42.786,134.955 60.92,134.955 v1(60.925,134.95) ; v1(64.075,134.925) 64.083,134.917 64.083,130.038 U30.26@64.09,130.03
  Bottom Layer w0.25: v1(60.925,134.95) 60.937,134.938 64.063,134.938 v1(64.075,134.925)
NetU25_12: U25.12 U30.28 | length 24.8
  Top Layer w0.25: U25.12@42.257,135.625 61.404,135.625 61.55,135.479 U30.28@61.55,130.03
NetU25_13: U25.13 U30.22 | length 31.2
  Top Layer w0.25: U25.13@42.598,136.261 66.514,136.261 69.17,133.605 U30.22@69.17,130.03
NetU28_11: U28.11 U33.9 | length 75.7
  Top Layer w0.25: U28.11@36.214,107.931 39.304,107.931 39.85,107.385 39.85,103.65 46.925,96.575 94.2,96.575 v1(94.225,96.6) ; U33.9@102.275,97.125 102.288,97.137 103.537,97.137 v1(103.55,97.15)
  Bottom Layer w0.25: v1(94.225,96.6) 94.256,96.6 94.806,97.15 v1@103.545,97.15
NetU28_12: U28.12 U33.12 | length 67.4
  Top Layer w0.25: U28.12@36.214,108.581 39.149,108.581 40.2,107.53 40.2,103.795 46.87,97.125 U33.12@96.635,97.125
NetU28_13: U28.13 U33.11 | length 67.4
  Top Layer w0.25: U28.13@36.214,109.231 38.994,109.231 40.55,107.675 40.55,103.94 46.74,97.75 U33.11@96.622,97.75
NetU50_2: U50.2 XTAL1.3 | length 1.9
  Top Layer w0.25: U50.2@114.567,135.56 XTAL1.3@114.567,137.464
OE: J10.2 U20.7 | length 12.8
  Top Layer w0.25: J10.2@103.417,123.764 104.942,125.29 104.942,127.59 105.855,128.502 105.855,131.902 106.532,132.58 U20.7@106.532,135.275
PCB_ANA_0V75: R30.2 R76.2 U53.1 U54.1 U55.1 | length 75.8
  Top Layer w1: U53.1@111.799,183.39 111.799,186.281 112.385,186.867 126.625,186.867 ; U54.1@126.62,183.39 126.62,186.862 126.647,186.889 155.724,186.889 156.31,186.304 U55.1@156.31,183.39 156.381,183.318 156.381,173.34 R30.2@156.452,173.268 156.452,173.168 156.527,173.093 157.407,173.093 157.992,172.508 157.992,165.104 157.407,164.518 156.402,164.518 156.327,164.443 R76.2@156.327,164.343
PCB_CORE_0V75: R10.2 R18.2 U52.1 | length 24.2
  Top Layer w1: R18.2@140.34,164.096 141.857,164.096 142.442,164.682 142.725,164.965 142.725,173.7 v7(142.65,173.775) ; R10.2@140.415,172.521 142.557,172.521 142.65,172.614 ; U52.1@141.54,183.389 U52.1@141.733,183.197
  Layer 2 w1: U52.1@141.55,183.379 141.55,174.875 v7(142.65,173.775)
PCB_IO_1V8: C44.2 C45.2 U6.9 U6.10 U6.11 U6.12 U6.13 U56.1 | length 15.5
  Top Layer w0.5: C45.2@171.455,168.041 C44.2@171.455,170.2
  Top Layer w1: U56.1@171.178,183.4 171.178,170.527 171.455,170.25 C44.2@171.455,170.2
PCB_USB_3V3_GEN: 3P3.1 3V3.1 C58.2 C59.2 U1.1 U3.3 | length 83.7
  Top Layer w1: v1(194.875,187.75) U3.3@194.875,189.275
  Layer 2 w1: U1.1@177.625,125.724 177.625,134.414 178.211,135 188.489,135 189.075,135.586 189.261,135.772 189.261,154.211 196.55,161.5 196.55,175.368 195.275,176.643 195.275,176.815 3V3.1@194.947,177.143 ; 3V3.1@194.775,177.143 3V3.1@194.775,177.586 194.875,177.686 v1(194.875,187.75)
  Layer 2 w2: 3V3.1@194.775,177.143 3V3.1@194.947,177.143
  Bottom Layer w1: v1(194.875,187.75) 195.266,188.141 C58.2@195.266,190.82 C59.2@195.266,192.979
PIR+: J6.27 J7.26 R67.1 | length 130.7
  Top Layer w0.25: v1(78.3,88.25) 78.3,79.549 R67.1@78.349,79.499 ; v1(166.2,88.6) 166.2,82.65 169.472,79.378 v1(169.472,79.35)
  Bottom Layer w0.25: v1(78.3,88.25) 80.83,88.25 81.18,88.6 v1(166.2,88.6) ; v1(169.472,79.35) 184.677,79.35 J6.27@185.654,80.327 ; J6.27@185.654,80.321 188.507,77.468 J7.26@191.115,77.468
PIRi: C179.2 J2.L1 J6.25 J7.25 U42.1 U43.3 | length 127.9
  Top Layer w0.25: v1(120.9,101) 120.9,129.557 J2.L1@122.427,131.084 ; C179.2@133.3,100.95 133.1,101.15 v1(131.55,101.15) 131.55,97.466 131.696,97.319 164.557,97.319 164.704,97.173 164.704,90.971 164.9,90.775 v1(166.15,90.775) 167.051,90.775 167.198,90.629 U42.1@167.198,89.509 ; v1(180.15,83.375) 180.15,89.05 v1(180.175,89.075)
  Bottom Layer w0.25: v1(120.9,101) 131.305,101 131.455,101.15 v1(131.55,101.15) ; v1(166.15,90.775) 166.245,90.775 166.668,90.351 167.639,90.351 168.049,89.941 168.049,89.56 U43.3@168.15,89.459 168.15,88.546 168.296,88.4 179.5,88.4 v1(180.175,89.075) ; v1(180.15,83.375) 184.606,83.375 J6.25@185.654,82.327 189.406,78.575 192.548,78.575 J7.25@193.655,77.468
PIRo: J6.26 PIR.1 U6_U_sink_iref_gen1.5 | length 130.5
  Top Layer w0.25: U6_U_sink_iref_gen1.5@78.344,73.695 v1(79.645,73.695) ; v1(180.975,88.05) 180.975,82.498 181.146,82.327 J6.26@183.654,82.327
  Bottom Layer w0.25: v1(79.645,73.695) 79.74,73.695 80.13,74.085 ; PIR.1@85.993,74.535 85.543,74.085 80.13,74.085 ; v1(180.975,88.05) 81.125,88.05 80.13,87.055 80.13,74.085
PLL_CFG_VLD_STRB: FMC1.G12 R87.1 | length 100.4
  Top Layer w0.25: v1(41.95,139.925) 44.904,139.925 45.283,139.546 45.283,138.995 v1(45.35,138.928)
  Bottom Layer w0.25: FMC1.G12@33.782,140.462 34.327,139.917 41.942,139.917 v1(41.95,139.925) ; v1(45.35,138.928) 45.3,138.978 45.3,139.68 46.245,140.625 90.355,140.625 92.15,138.83 92.15,110 95.25,106.9 R87.1@101.175,106.9